# Altium PCB Energetski_deo_ploce.PcbDoc (part 2 of 2)
Units mm, origin at the board's own origin, x right, y up, seen from the top; angles counter-clockwise.
Board outline 196.98 x 121.92 mm, 4 copper layers (Energetika, Napajanje 2, Mikroprocesor, Zemlja), stack 1.961 mm thick; 114 components, 87 nets, 356 pads, 23 vias.
Unrouted connection lines stored in the file: 4.
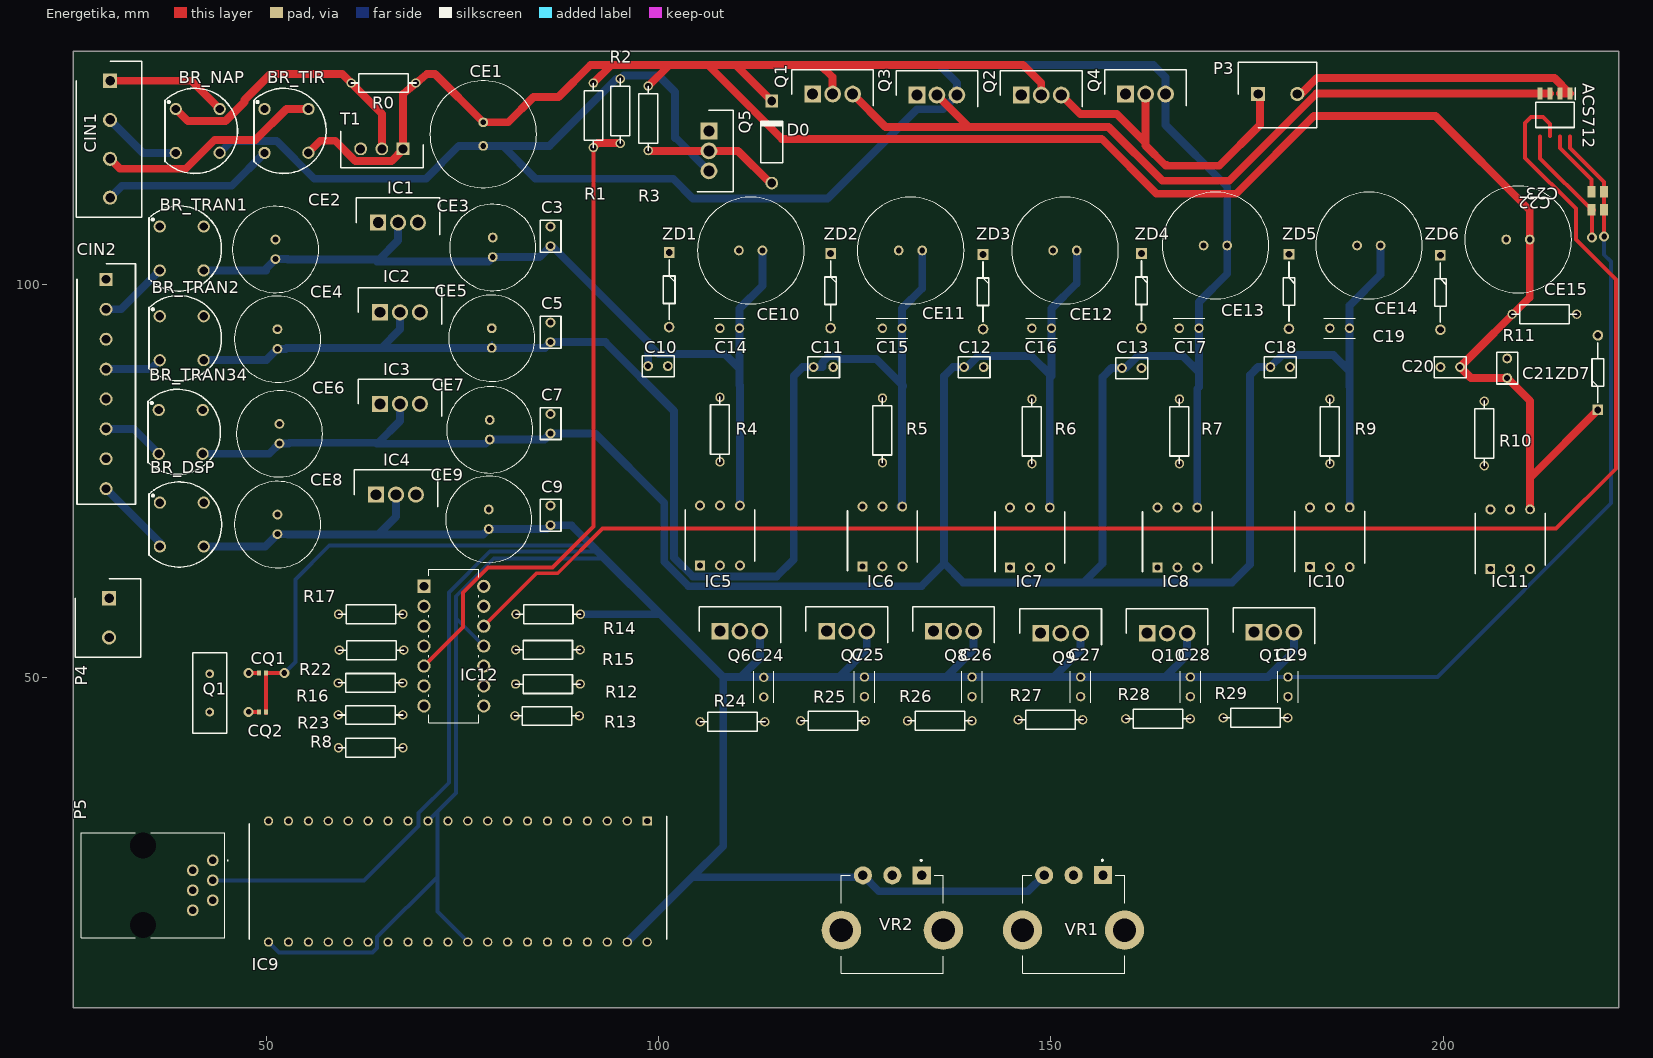
[diagram p0: Energetika view]

## Via types
v1: diameter 1.27, hole 0.711, Energetika to Napajanje 2, 12 vias
v2: diameter 1.27, hole 0.711, Energetika to Mikroprocesor, 9 vias
v3: diameter 1.27, hole 0.711, Energetika to Zemlja, 2 vias

## Nets (pads, with @x,y where several pads share a name; then routed paths per layer and width w, separated by ;. In a path a pad name is that pad's centre, name@x,y a point inside that pad or via, vN(x,y) a via of type N, cw(c..) or ccw(c..) an arc to the next point about the centre after c; other vN are vias at no path point) (continued)
VSS: (continued)
  Zemlja w1: BR_DSP.3 49.871,66.675 CE8.2 52.749,68.239 52.789,68.199 64.262,68.199 ; IC4.2 66.543,70.48 64.262,68.199 ; R14.1 100.17,58.039 100.203,58.072 ; 92.108,66.167 91.473,66.802 88.893,69.382 C9.1 85.745,68.894 CE9.2 77.664,68.199 64.262,68.199 ; 92.235,66.04 92.87,65.405 100.203,58.072 ; IC9.39 104.267,24.511 ; Q6.3 112.923,52.471 110.49,50.038 ; 125.349,50.038 123.063,50.038 ; 125.603,50.038 C25.2 136.652,50.038 ; Q7.3 126.533,53.508 123.063,50.038 ; Q8.3 140.144,53.53 136.652,50.038 ; VR1.3 147.088,22.733 128.076,22.733 VR2.3 125.79,24.511 104.267,24.511 ; Q9.3@153.754,55.88 153.754,53.424 150.368,50.038 ; 164.719,50.038 C28.2 177.673,50.038 180.975,53.34 Q11.3 ; Q10.3 167.365,52.811 164.592,50.038 C27.2 150.368,50.038 ; 100.203,58.072 108.237,50.038 ; 104.267,24.511 108.237,28.481 108.237,50.038 ; 108.237,50.038 110.49,50.038 ; 110.49,50.038 123.063,50.038 ; 136.652,50.038 C26.2 150.368,50.038
pads on no net: IC5.2 IC6.2 IC7.2 IC8.2 IC9.2 IC9.3 IC9.9 IC9.10 IC9.15 IC9.16 IC9.17 IC9.18 IC9.19 IC9.22 IC9.23 IC9.24 IC9.27 IC9.28 IC9.29 IC9.30 IC10.2 IC11.2 IC12.8 IC12.9 IC12.10 P5.6 P5.7 P5.8 VR1.MH1 VR1.MH2 VR2.MH1 VR2.MH2

## Polygon pours and split planes (outlines as drawn)
no net on Zemlja "GND" (solid, pour order 6): 25.527,129.667 25.654,129.54 222.123,129.54 222.123,68.58 163.068,9.525 162.941,9.652 25.781,9.652

## Other copper
Mikroprocesor:
  text "MOT +" at 214.884,125.603 h0.5
  text "MOT +" at 184.404,125.095 h0.5